# EAGLE board M_G_ext_motor (EAGLE 9.6.2)
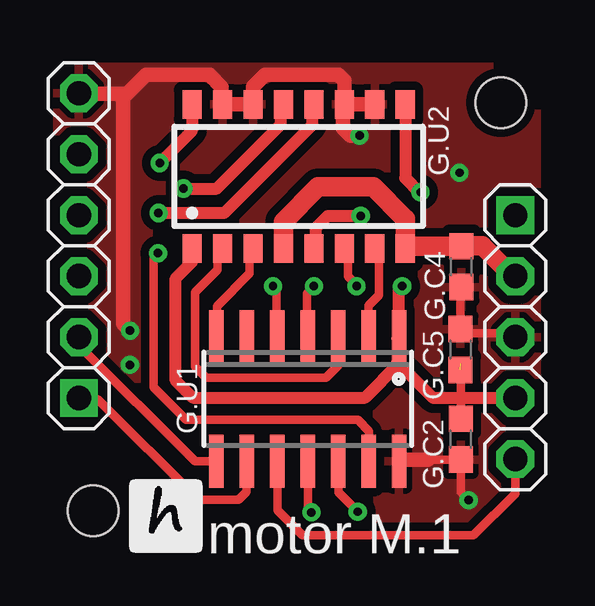
[diagram p0: board, top side]
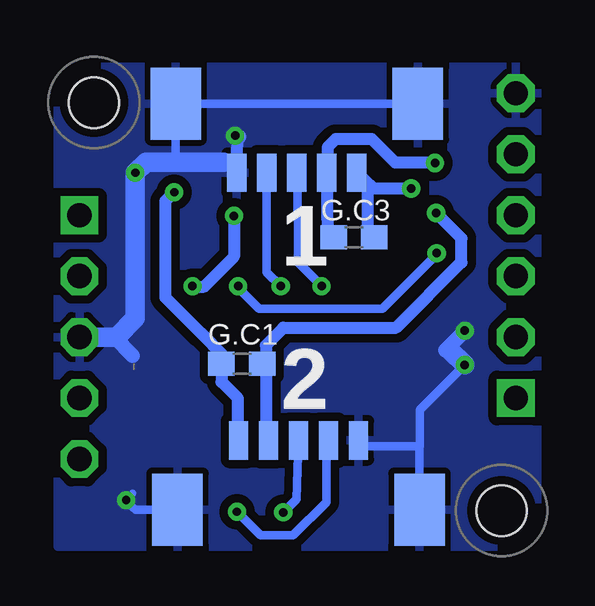
[diagram p1: board, bottom side, seen from below]

No outline drawn. Coordinates in mm, seen from the top.
Copper layers (1*16): Top 0.035mm / dielectric 1.5mm / Bottom 0.035mm
Design rules "default *": minimum track width 12mil, minimum drill 0.35mm, track to track 14mil, track to pad 13mil, pad to pad 10mil, via to via 14mil, smd to smd 14mil, copper to edge 15mil, drill to drill 15mil, minimum pad ring 10mil, minimum via ring 8mil, stop-mask expansion 4mil, vias tented up to drill 0mil, thermal gap 10mil
Holes 2.1 mm at 2,2 19,19

## Footprints (pad centres in the part's own frame; a part is rotated, then mirrored left to right if it is on the bottom)
C0603 = smd 1.1 x 1: 1 -0.85,0; 2 0.85,0
1X06 = drill 1.016 pad 1.575 square: 1 -6.35,0 | drill 1.016 pad 1.575 octagon: 2 -3.81,0; 3 -1.27,0; 4 1.27,0; 5 3.81,0; 6 6.35,0
1X05 = drill 1.016 pad 1.575 square: 1 -5.08,0 | drill 1.016 pad 1.575 octagon: 2 -2.54,0; 3 0,0; 4 2.54,0; 5 5.08,0
A1250WR = smd 0.8 x 1.6: 1 -2.46,2.54; 2 -1.21,2.54; 3 0.04,2.54; 4 1.29,2.54; 5 2.54,2.54 | smd 2.1 x 3: $1 -5.01,-0.34; $2 5.08,-0.34
SO14 = smd 0.6 x 2.2: 1 -3.81,-2.6; 2 -2.54,-2.6; 3 -1.27,-2.6; 4 0,-2.6; 5 1.27,-2.6; 6 2.54,-2.6; 7 3.81,-2.6; 8 3.81,2.6; 9 2.54,2.6; 10 1.27,2.6; 11 0,2.6; 12 -1.27,2.6; 13 -2.54,2.6; 14 -3.81,2.6
SOP16 = smd 0.8 x 1.2: 1 -4.445,-3; 2 -3.175,-3; 3 -1.905,-3; 4 -0.635,-3; 5 0.635,-3; 6 1.905,-3; 7 3.175,-3; 8 4.445,-3; 9 4.445,3; 10 3.175,3; 11 1.905,3; 12 0.635,3; 13 -0.635,3; 14 -1.905,3; 15 -3.175,3; 16 -4.445,3

## Placement (x,y rotation side)
G.C1  100n  [C0603]  12.83,8.13 180 bottom
G.C2  100n  [C0603]  17.32,4.98 90 top
G.C3  100n  [C0603]  8.15,13.39 0 bottom
G.C4  4u7  [C0603]  17.36,12.16 90 top
G.C5  4u7  [C0603]  17.32,8.71 270 top
G.J1  [1X06]  1.4,13.04 90 top
G.J2  [1X05]  19.6,9.23 270 top
G.J3  A1250WR  [A1250WR]  10.5,2.39 0 bottom
G.MOTO1  A1250WR  [A1250WR]  10.5,18.62 180 bottom
G.U1  AT414  [SO14]  10.95,6.65 180 top
G.U2  MX1508  [SOP16]  10.57,15.93 0 top

## Library data of the parts
G.C1-G.C5 = rcl; SPICEPREFIX: C
G.J1 G.J2 = pinhead2
G.J3 G.MOTO1 G.U2 = hugo
G.U1 = atmel

## Nets
FOTO1: G.MOTO1.3 G.U1.5
FOTO2: G.J3.4 G.U1.12
GND: G.C2.1 G.C4.1 G.C5.1 G.J1.6 G.J2.3 G.J3.5 G.J3.$1 G.J3.$2 G.MOTO1.5 G.MOTO1.$1 G.MOTO1.$2 G.U1.14 G.U2.10 G.U2.11 G.U2.14 G.U2.15
INA1: G.U1.3 G.U2.2
INA2: G.U1.13 G.U2.6
INB1: G.U1.7 G.U2.3
INB2: G.U1.2 G.U2.7
LED1: G.MOTO1.4 G.U1.4
LED2: G.J3.3 G.U1.11
M1: G.C3.2 G.MOTO1.1 G.U2.13
M2: G.C3.1 G.MOTO1.2 G.U2.16
M3: G.C1.2 G.J3.1 G.U2.9
M4: G.C1.1 G.J3.2 G.U2.12
M_SRC: G.C4.2 G.J2.2 G.U2.4 G.U2.8
N$7: G.J2.5 G.U1.10
N$19: G.J1.1 G.U1.9
N$20: G.J1.2 G.U1.8
VCC: G.C2.2 G.C5.2 G.J2.4 G.U1.1 G.U2.1 G.U2.5

## Tracks (layer width: path | path; a pad name or v marks a point on that pad's centre or on a via)
FOTO1  (via drill 0.35)
  Top 0.356: G.U1.5 9.65,9.28 9.65,11.2 v9.5,11.35
  Bottom 0.356: v9.5,11.35 9.5,11.38 10.48,12.36 10.51,16.05 G.MOTO1.3
FOTO2  (via drill 0.35)
  Top 0.356: G.U1.12 12.22,2.77 v13.03,1.96
  Bottom 0.356: v13.03,1.96 12.04,0.96 10.69,0.96 9.3,2.36 9.3,4.93 G.J3.4
GND  (via drill 0.35)
  Top 0.356: G.C4.1 17.32,11.28 G.C5.1 17.57,9.56 17.75,9.38 19.45,9.38 G.J2.3 | 15.96,4.13 G.C2.1 17.32,2.77 v17.65,2.44
  Top 0.406: G.C2.1 17.32,3.98 17.18,3.83
  Top 0.61: G.C2.1 17.24,4.13 | 15.96,4.13 14.76,4.13 G.U1.14 | G.U2.11 G.U2.10 | G.U2.11 12.47,19.91 12.22,20.17 9.17,20.17 8.66,19.66 G.U2.14 G.U2.15 7.36,18.96 7.36,19.65 6.85,20.16 4.2,20.16 3.27,19.23 3.25,19.23 | G.U2.11 12.42,18.88 12.42,17.93 12.72,17.63 v13.11,17.63 | G.J1.6 1.42,19.38 3.25,19.38 3.25,19.23 | 3.25,19.23 3.25,9.79 v3.53,9.5
  Bottom 0.305: 17.37,2.72 v17.65,2.44 | 13.58,16.52 13.49,16.52 G.MOTO1.5
  Bottom 0.356: 4.14,8.69 4.35,8.69 4.37,8.69 | v3.53,8.08 5.41,6.2 5.41,4.67 5.42,4.67 | 5.42,4.67 G.J3.$2 | G.J3.$1 17.26,2.05 17.49,2.23 17.49,2.28 v17.65,2.44 | G.J3.5 7.8,4.67 5.42,4.67 | 15.52,16.52 15.58,16.59 G.MOTO1.$2 G.MOTO1.$1
  Bottom 0.508: G.MOTO1.5 13.01,17.52 12.95,17.57
  Bottom 0.61: v13.11,17.63 13.01,17.63 12.95,17.57 | v3.53,9.5 v3.54,9.5 4.35,8.69 | 17.37,8.46 18.14,9.23 G.J2.3
  Bottom 0.813: 13.58,16.52 15.52,16.52 16.83,16.52 v17.27,16.08 17.27,10.01 18.05,9.23 G.J2.3 | v3.53,8.08 4.14,8.69
  pour Top (isolate 0.305): 0.5,20.5 0.5,0.5 20.5,0.5 20.5,20.5
  pour Bottom (isolate 0.305): 0.5,20.5 0.5,0.5 20.5,0.5 20.5,20.5
INA1
  Top 0.356: G.U1.3 12.22,8.05 11.71,7.54 6.71,7.54 6.25,8 6.25,11.1 7.2,12.04 7.2,12.73 G.U2.2
INA2  (via drill 0.35)
  Top 0.356: G.U1.13 13.51,4.08 13.51,5.31 13.03,5.79 5.87,5.79 4.52,7.13 4.52,12.55 v4.7,12.73 | G.U2.6 12.62,12.77 12.62,11.76 13.03,11.35 v12.98,11.35
  Bottom 0.356: v12.98,11.35 12.98,11.28 12.11,10.42 6.97,10.42 4.7,12.69 v4.7,12.73
INB1
  Top 0.356: G.U2.3 8.53,12.79 8.53,11.89 7.16,10.52 7.16,9.28 G.U1.7
INB2
  Top 0.356: G.U2.7 13.92,12.75 13.92,10.97 13.49,10.54 G.U1.2
LED1  (via drill 0.35)
  Top 0.356: G.U1.4 10.92,9.28 10.92,11.05 11.2,11.33 v11.2,11.35
  Bottom 0.356: G.MOTO1.4 11.79,11.94 v11.2,11.35
LED2  (via drill 0.35)
  Top 0.356: G.U1.11 10.95,2.08 v11.1,1.93
  Bottom 0.356: v11.1,1.93 10.55,2.48 G.J3.3
M1  (via drill 0.35)
  Top 0.508: v5.77,15.42 7.15,15.42 9.82,18.09 9.82,18.82 G.U2.13
  Bottom 0.508: G.C3.2 7.56,13.79 7.56,15.59 7.81,15.85 8.04,15.94 G.MOTO1.1 7.37,15.44 5.79,15.44 v5.77,15.42
M2  (via drill 0.35)
  Top 0.508: G.U2.16 6.12,17.83 v4.78,16.48
  Bottom 0.508: 9.19,13.22 G.C3.1 9.17,13.37 9.26,13.37 9.28,13.4 | v4.78,16.48 4.8,16.51 6.44,16.51 7.41,17.48 8.91,17.48 9.26,17.14 G.MOTO1.2 9.26,13.43 9.28,13.4 | 9.28,13.4 9.25,13.58
M3  (via drill 0.35)
  Top 0.508: v15.65,15.27 15.63,15.25 15.01,15.86 G.U2.9
  Bottom 0.356: 14.45,9.32 14.5,9.37
  Bottom 0.508: v15.65,15.27 16.02,14.9 16.02,10.89 14.5,9.37 | 14.45,9.32 13.68,8.55 G.C1.2 13.68,7.37 12.99,6.68 12.99,4.95 G.J3.1
M4  (via drill 0.35)
  Top 0.508: v4.72,14.4 7.46,14.4 11.12,18.07 11.12,18.84 G.U2.12
  Bottom 0.508: v4.72,14.4 3.66,13.34 3.66,12.35 6.39,9.63 11.09,9.63 11.83,8.89 11.83,8.28 G.C1.1 11.83,8.13 11.83,5.04 G.J3.2
M_SRC
  Top 0.305: 15.01,14.17 15.01,14.16
  Top 0.813: G.U2.8 15.01,13.08 15.07,13.02 G.C4.2 17.37,13.03 18.24,13.03 19.5,11.77 G.J2.2 | 15.01,14.17 13.68,15.49 11.38,15.49 9.93,14.05 G.U2.4 | G.U2.8 15.01,13.03 | 15.01,14.16 G.U2.8
N$7
  Top 0.356: 9.6,3.98 G.U1.10 9.68,2.02 10.73,0.97 17.86,0.97 19.6,2.71 G.J2.5
N$19
  Top 0.356: G.U1.9 8.4,2.79 8.05,2.45 6.39,2.45 2.19,6.65 G.J1.1
N$20
  Top 0.356: G.U1.8 6.24,4.05 1.4,8.9 G.J1.2
VCC  (via drill 0.35)  (1 unrouted)
  Top 0.356: G.C2.2 17.32,6.69 17.32,7.87 | 17.32,8.11 17.29,8.14
  Top 0.508: 6.28,12.77 G.U2.1 6.12,12.37 5.44,11.68 5.44,7.42 6.15,6.71 13.34,6.71 14.76,8.12 | G.U1.1 14.76,11.21 v14.88,11.35 | G.U2.5 11.28,13.01 11.28,13.79 11.78,14.29 v13.16,14.29 | G.U1.1 14.71,9.2 14.71,8.42 | G.U1.1 14.68,9.18 14.68,8.2 14.76,8.12 | 17.32,7.87 G.C5.2 | 17.29,8.14 17.29,8.08 17.09,8.08 | G.J2.4 17.32,6.69 16.19,6.69 14.76,8.12 | G.C2.2 17.29,5.86
  Bottom 0.508: v13.16,14.29 13.16,12.58 14.4,11.34 v14.87,11.34 v14.88,11.35

## Text on the board
tPlace: motor M.1
bNames: 1 | 2